# Altium PCB Battery_Charger_BQ24650.PcbDoc (part 1 of 2)
Units mm, origin at the board's own origin, x right, y up, seen from the top; angles counter-clockwise.
Board outline 55 x 60 mm, 2 copper layers (Top Layer, Bottom Layer), stack 1.135 mm thick; 79 components, 33 nets, 199 pads, 65 vias.
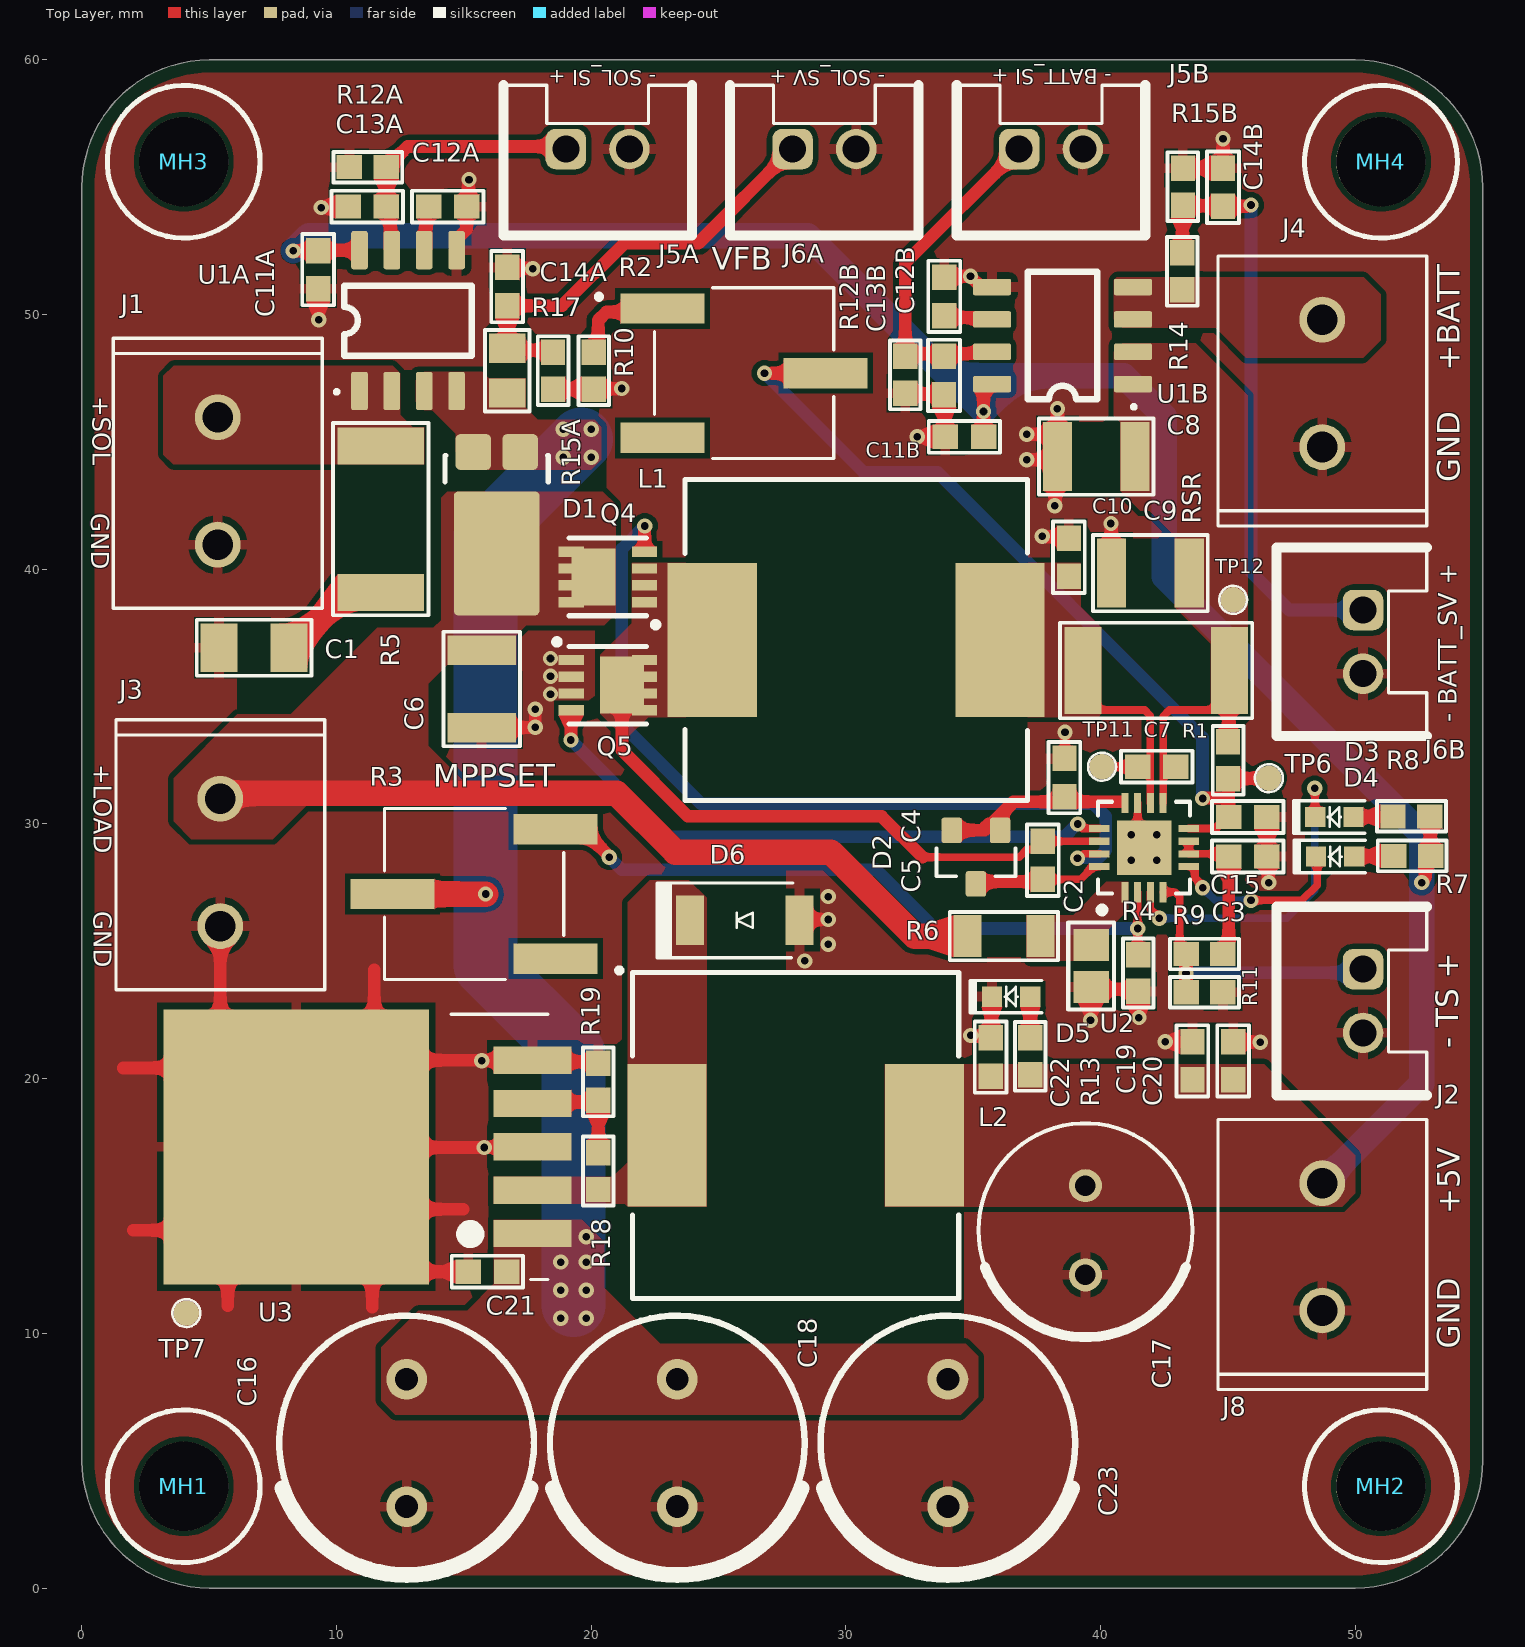
[diagram p0: Top Layer view]
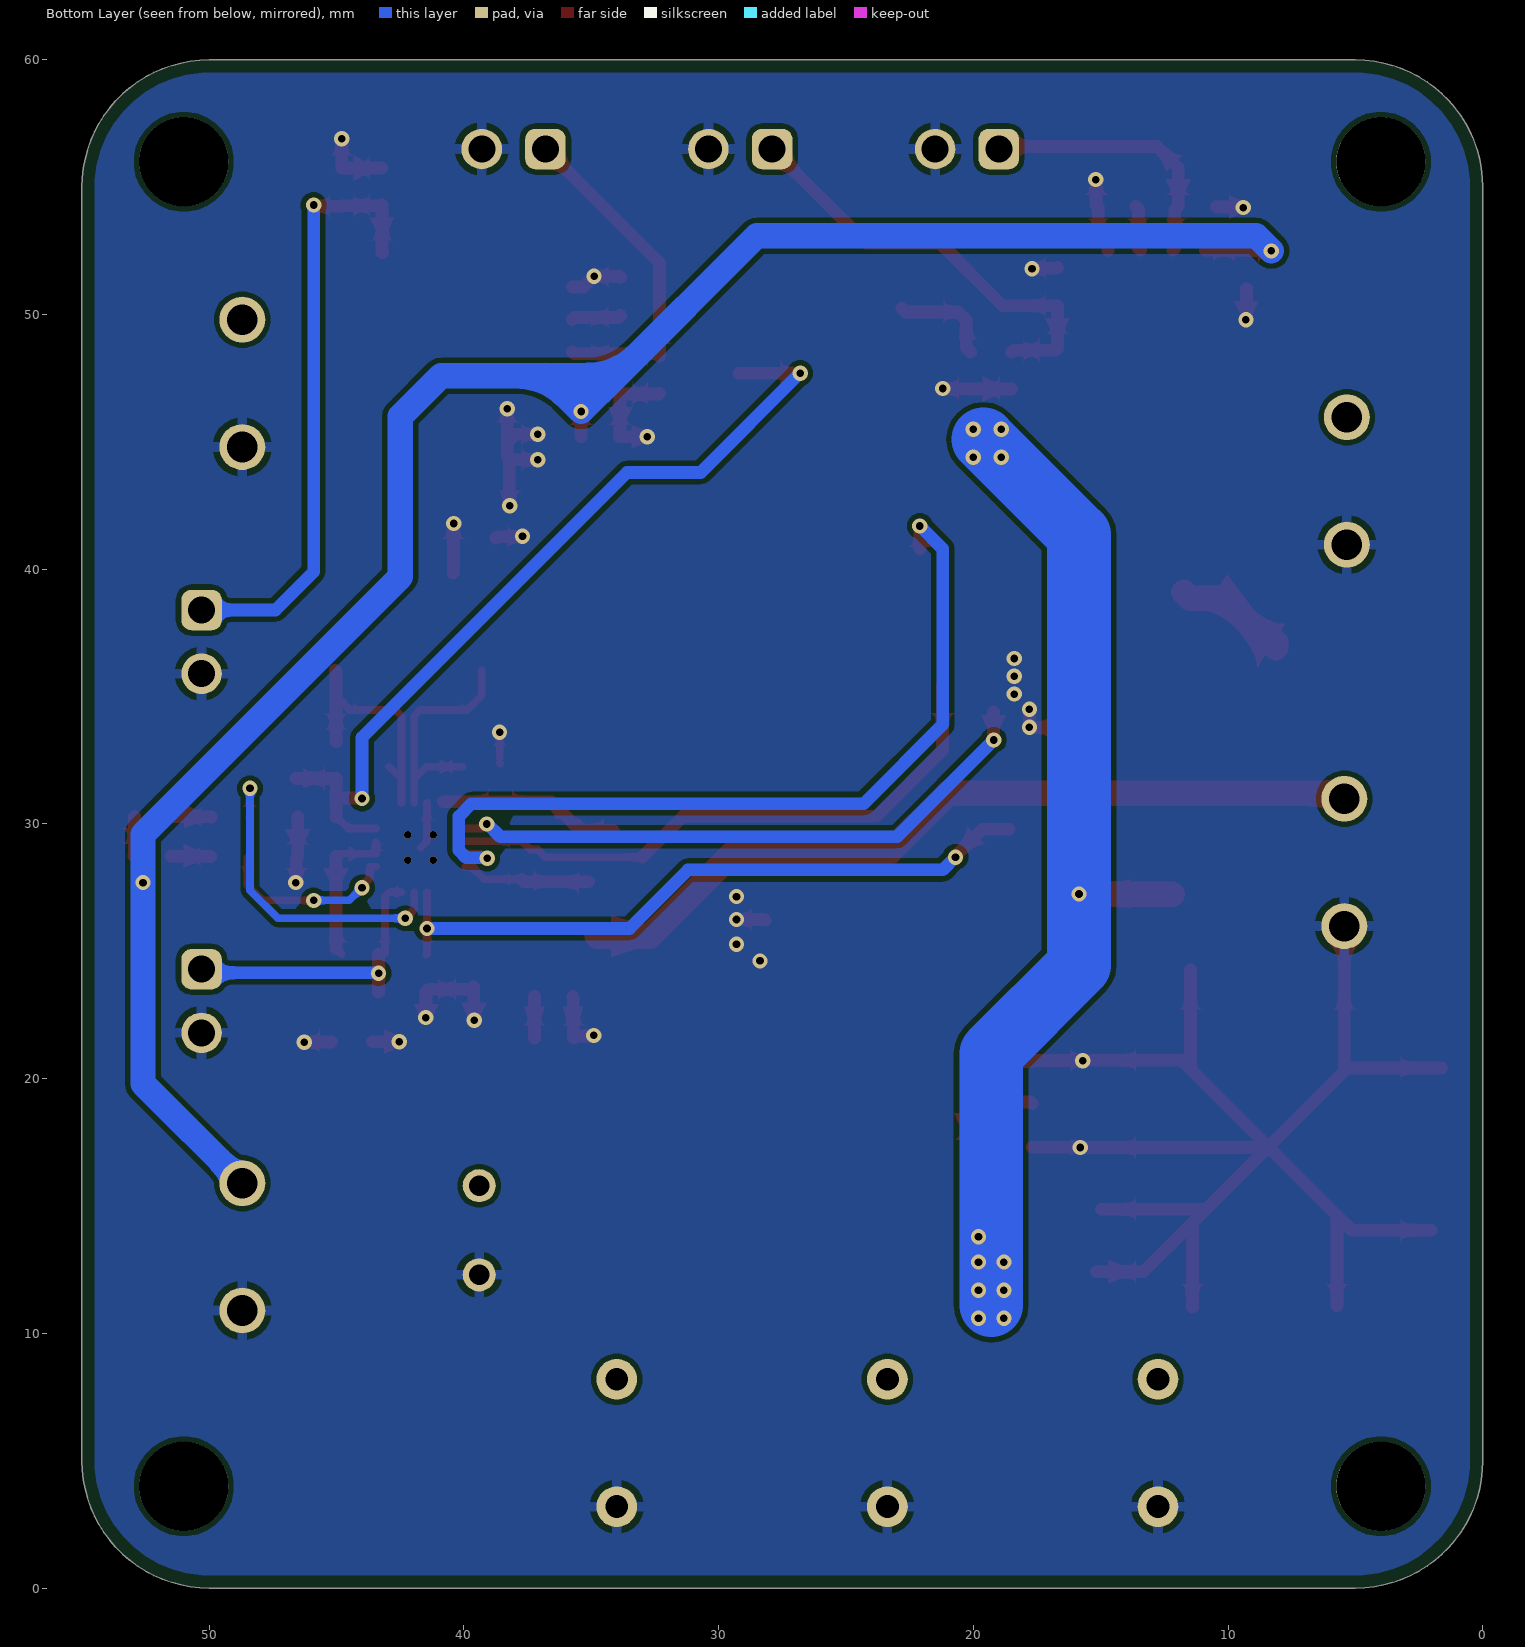
[diagram p1: Bottom Layer view, seen from below]
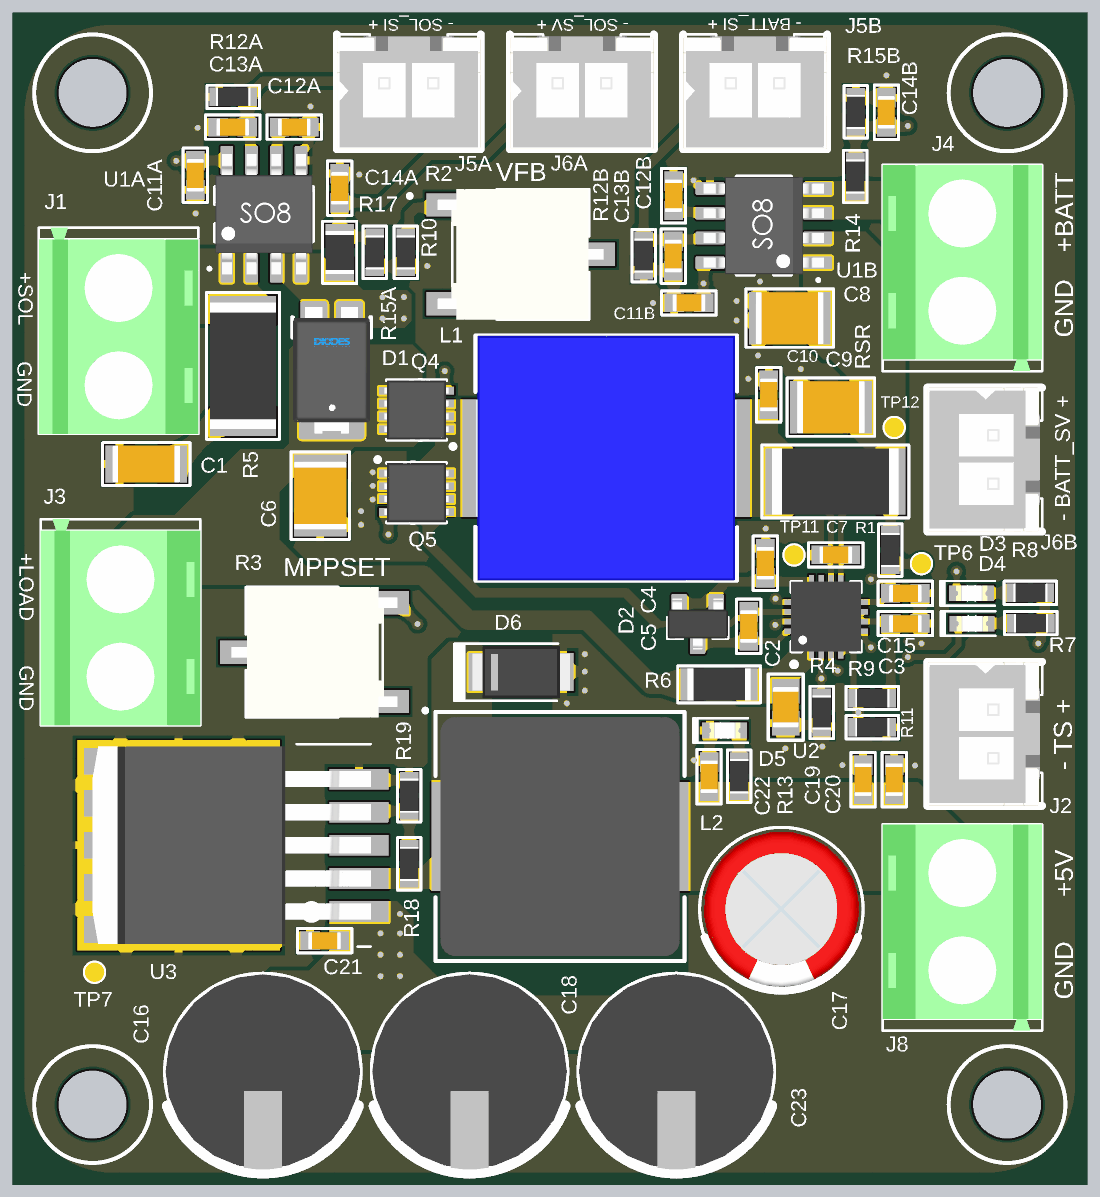
[diagram p2: 3D render of the assembled board from above, using the file's embedded part models]

## Layer stack, top to bottom
Top Solder: solder mask 0.01, Solder Resist, Dk 3.5
Top Layer: signal copper 0.035
Dielectric 1: dielectric 1.065, FR-4, Dk 4.8
Bottom Layer: signal copper 0.035
Bottom Solder: solder mask 0.01, Solder Resist, Dk 3.5

## Board outline
0,5 0,55 cw(c5,55) 5,60 50,60 cw(c50,55) 55,55 55,5 cw(c50,5) 50,0 5,0 cw(c5,5)

## Design rules (kind name [scope] priority, off if disabled: settings)
BoardOutlineClearance [All] p1: gap=0.5 ignorepadtopadclearanceinfootprint=FALSE
Clearance Clearance_DIFF_90_100 [InNetClass('USB_Z90') OR InNetClass('ETH_Z100') vs InNetClass('USB_Z90') OR InNetClass('ETH_Z100')] p1: gap=0.2 ignorepadtopadclearanceinfootprint=TRUE
Clearance Clearance_USB [InNet('D_N') OR InNet('D_P') vs InNet('D_N') OR InNet('D_P')] p2: gap=0.2 ignorepadtopadclearanceinfootprint=TRUE
Clearance Clearance_ALL [All] p3: gap=0.2 ignorepadtopadclearanceinfootprint=TRUE
DiffPairsRouting DiffPair_D90 [InDifferentialPairClass('USB_D90')] p1: maxlimit=0.305 minlimit=0.305 mostfreqgap=0.305 toplayer_minwidth=0.38 toplayer_maxwidth=0.38 toplayer_prefwidth=0.38 bottomlayer_minwidth=0.38 bottomlayer_maxwidth=0.38 bottomlayer_prefwidth=0.38 impedanceprofiledriven=TRUE impedanceprofileid={359ADB75-7CFB-4B50-BE62-D8C1BD735708} impedanceprofilevalue=90.000000 maxuncoupledlength=12.7
DiffPairsRouting DiffPair_D100 [InDifferentialPairClass('ETHERNET_D100')] p2: maxlimit=0.317 minlimit=0.317 mostfreqgap=0.317 toplayer_minwidth=0.31 toplayer_maxwidth=0.31 toplayer_prefwidth=0.31 bottomlayer_minwidth=0.31 bottomlayer_maxwidth=0.31 bottomlayer_prefwidth=0.31 impedanceprofiledriven=TRUE impedanceprofileid={7F6E921B-FC01-47E9-AA2A-496961F6C834} impedanceprofilevalue=100.000000 maxuncoupledlength=12.7
PlaneConnect [All] p1: pad.planeconnectstyle=Relief pad.reliefexpansion=0.508 pad.reliefentries=4 pad.reliefconductorwidth=0.254 pad.reliefairgap=0.254 via.planeconnectstyle=Direct via.reliefexpansion=0.508 via.reliefentries=4 via.reliefconductorwidth=0.254 via.reliefairgap=0.254
PolygonConnect Polygon_SMD [InNet('Vin') OR InNet('Vcc') OR InNet('NetC6_2') OR InNet('ph') OR InNet('NetJ4_2') OR InNet('SRN') OR InNet('SRP') OR InNet('NetD6_2') OR InNet('5V') OR InNet('NetC2_1') vs InNet('Vin') OR InNet('Vcc') OR InNet('NetC6_2') OR InNet('ph') OR InNet('NetJ4_2') OR InNet('SRN') OR InNet('SRP') OR InNet('NetD6_2') OR InNet('5V') OR InNet('NetC2_1')] p1: connectstyle=Direct reliefconductorwidth=0.254 reliefentries=4 polygonreliefangle="90 Angle" airgapwidth=0.254
PolygonConnect [All] p2: thpad.connectstyle=Relief thpad.reliefconductorwidth=0.4 thpad.reliefentries=4 thpad.polygonreliefangle="90 Angle" thpad.airgapwidth=0.254 smdpad.connectstyle=Relief smdpad.reliefconductorwidth=0.4 smdpad.reliefentries=4 smdpad.polygonreliefangle="90 Angle" smdpad.airgapwidth=0.254 via.connectstyle=Direct via.reliefconductorwidth=0.254 via.reliefentries=4 via.polygonreliefangle="90 Angle" via.airgapwidth=0.254
RoutingVias [All] p1: holewidth=0.3 width=0.6 viastyle="Through Hole" minholewidth=0.3 minwidth=0.6 maxholewidth=0.4 maxwidth=0.8
SilkToSilkClearance [All] p1: silktosilkclearance=0.2
SolderMaskExpansion [All] p1: expansion=0.102 istentingtop=FALSE
SupplyNets "Schematic Supply Nets_1" [InNet('VCC')] p1: voltage=0.000
SupplyNets "Schematic Supply Nets_24" [InNet('Vref')] p2: voltage=0.000
SupplyNets "Schematic Supply Nets_23" [InNet('VIN')] p3: voltage=0.000
SupplyNets "Schematic Supply Nets_22" [InNet('5V')] p4: voltage=0.000
SupplyNets "Schematic Supply Nets" [InNet('GND')] p5: voltage=0.000
Width Width_DIFF_90_100 [InNetClass('USB_Z90') OR InNetClass('ETH_Z100')] p1: maxlimit=10 minlimit=0.2 preferedwidth=0.3
Width Width_PADS [InNet('D2_P') OR InNet('D2_N') OR InNet('XTALIN') OR InNet('XTALOUT') OR InNet('PLLFILT') OR InNet('RBIAS') OR InNet('PORT1_P') OR InNet('PORT1_N') OR InNet('PORT2_P') OR InNet('PORT2_N') OR InNet('+3V3_UART') OR InNet('NetC17_1') OR InNet('PRTRWR1') OR InNet('NetD12_2') OR InNet('VBUS_DET_USB') OR InNet('R\E\S\E\T\_HUB') OR InNet('CFG_SEL0') OR InNet('CFG_SEL1') OR InNet('NON_REM1') OR InNet('NON_REM0') OR InNet('O\C\S\1\') OR InNet('O\C\S\2\') OR InNet('PRTRWR2') OR InNet('CRFILT')] p2: maxlimit=10 minlimit=0.254 preferedwidth=0.3
Width [All] p3: maxlimit=10 minlimit=0.3 preferedwidth=0.3
27 further rules are at their usual default settings.

## Classes and differential pairs
channel class Sensor: A B
component class Top_Sheet: C1 C2 C3 C4 C5 C6 C7 C8 C9 C10 C15 C16 C17 C18 C19 C20 C21 C22 C23 D1 D2 D3 D4 D5 D6 J1 J2 J3 J4 L1 L2 MH1 MH2 MH3 MH4 Q4 Q5 R1 R2 R3 R4 R5 R6 R7 R8 R9 R10 R11 R13 R14 R16 R17 R18 R19 RSR TP6 TP7 TP11 TP12 U2 U3
component class B: C11B C12B C13B C14B J5B J6B R12B R15B U1B
component class A: C11A C12A C13A C14A J5A J6A R12A R15A U1A

## Components (designator, comment, footprint, x,y, rotation, side; value= is the part's Value field where it differs from the comment)
C1 "GMK316B7225KLHT" CAP-1206-IPC 6.76,36.918 r180 top value=2.2uF
C2 "CL21B105KBFNNNE" CAP-0805-H1.35-IPC 39.625,24.425 r270 top value=1uF
C3 "CL10B105KO8NNNC" CAP-0603-IPC 45.775,28.725 r180 top value=1uF
C4 "CL10B105KO8NNNC" CAP-0603-IPC 38.575,31.825 r270 top value=1uF
C5 "CL10B104KB8NNWC" CAP-0603-IPC 37.725,28.575 r90 top
C6 "CL32B106KBJNNNE" CAP-1210-IPC 15.7,35.3 r90 top value=10uF
C7 "CL10B104KB8NNWC" CAP-0603-IPC 42.2,32.25 r180 top
C8 "CL32B106KBJNNNE" CAP-1210-IPC 39.825,44.425 r0 top value=10uF
C9 "CL32B106KBJNNNE" CAP-1210-IPC 41.95,39.85 r0 top value=10uF
C10 "CL10B104KB8NNWC" CAP-0603-IPC 38.75,40.475 r270 top
C11A "CL10B104KB8NNWC" CAP-0603-IPC 9.28,51.764 r270 top (schematic designator C11)
C11B "CL10B104KB8NNWC" CAP-0603-IPC 34.65,45.2 r180 top (schematic designator C11)
C12A "CL10B104KB8NNWC" CAP-0603-IPC 14.365,54.239 r180 top (schematic designator C12)
C12B "CL10B104KB8NNWC" CAP-0603-IPC 33.857,50.71 r270 top (schematic designator C12)
C13A "CL10B104KB8NNWC" CAP-0603-IPC 11.205,54.239 r0 top (schematic designator C13)
C13B "CL10B104KB8NNWC" CAP-0603-IPC 33.848,47.61 r90 top (schematic designator C13)
C14A "CL10B104KB8NNWC" CAP-0603-IPC 16.7,51.1 r270 top (schematic designator C14)
C14B "CL10B104KB8NNWC" CAP-0603-IPC 44.8,55 r270 top (schematic designator C14)
C15 "06035C220JAT2A" CAP-0603-IPC 45.775,30.275 r0 top value=22pF
C16 "UVZ1H221MPD" "CAP RADIAL CAN TH D10mm, H12.5mm, LS5mm" 12.75,5.7 r270 top value=220uF
C17 "860020474014" "CAP RADIAL CAN TH D8mm,H13mm,LS3.5mm_860020474014" 39.4,14.05 r270 top value=470uF
C18 "UVZ1H221MPD" "CAP RADIAL CAN TH D10mm, H12.5mm, LS5mm" 23.375,5.7 r270 top value=220uF
C19 "CL10B105KO8NNNC" CAP-0603-IPC 43.6,20.7 r270 top value=1uF
C20 "CL10B104KB8NNWC" CAP-0603-IPC 45.2,20.7 r270 top
C21 "CL10B104KB8NNWC" CAP-0603-IPC 15.925,12.425 r0 top
C22 "CL10B104KB8NNWC" CAP-0603-IPC 35.682,20.85 r270 top
C23 "UVZ1H221MPD" "CAP RADIAL CAN TH D10mm, H12.5mm, LS5mm" 34,5.7 r270 top value=220uF
D1 "SDT10A45P5-13D" Diode_PowerDI5 16.285,41.743 r270 top
D2 "BAT54C,215" "SOT-23-3, TO-236-3, SC-59-IPC" 35.1,28.7 r180 top value=30V
D3 "LTST-C190KRKT" LED-0603(1608) 49.175,30.275 r180 top
D4 "LTST-C190KRKT" LED-0603(1608) 49.2,28.723 r180 top
D5 "LTST-C190GKT" LED-0603(1608) 36.482,23.225 r180 top
D6 "PMEG3050EP,115" SOD-128/CFP5-IPC 26.025,26.225 r180 top value=30V
J1 "282836-2" "HDR/Conn 2 Pos 5mm_282836-2" 5.335,43.468 r270 top
J2 "B2B-XH-A" "HDR 2 POS 2.5mm ST M TH_B2B-XH-A" 50.3,24.3 r270 top
J3 "282836-2" "HDR/Conn 2 Pos 5mm_282836-2" 5.435,28.493 r270 top
J4 "282836-2" "HDR/Conn 2 Pos 5mm_282836-2" 48.7,47.3 r90 top
J5A "B2B-XH-A" "HDR 2 POS 2.5mm ST M TH_B2B-XH-A" 19,56.5 r0 top (schematic designator J5)
J5B "B2B-XH-A" "HDR 2 POS 2.5mm ST M TH_B2B-XH-A" 36.8,56.5 r0 top (schematic designator J5)
J6A "B2B-XH-A" "HDR 2 POS 2.5mm ST M TH_B2B-XH-A" 27.9,56.5 r0 top (schematic designator J6)
J6B "B2B-XH-A" "HDR 2 POS 2.5mm ST M TH_B2B-XH-A" 50.3,38.4 r270 top (schematic designator J6)
J8 "282836-2" "HDR/Conn 2 Pos 5mm_282836-2" 48.7,13.4 r90 top
L1 "125CDMCCDS-100MC" "Ind 13.45mm x 12.6mm_125CDMCCDS-100MC" 30.4,37.225 r0 top value=10uH
L2 "B82477G4333M000" "IND 12.8mmx12.8mm_B82477G4333M000" 28.025,17.775 r180 top value=33uH
MH1 "Mounting Hole" "Mounting Hole D3.5mm" 4,4 r0 top
MH2 "Mounting Hole" "Mounting Hole D3.5mm" 51,4 r0 top
MH3 "Mounting Hole" "Mounting Hole D3.5mm" 4,56 r0 top
MH4 "Mounting Hole" "Mounting Hole D3.5mm" 51,56 r0 top
Q4 "SIS412DN-T1-GE3" "Trans POWERPAK1212-8_SIS412DN-T1-GE3" 20.65,39.7 r180 top
Q5 "SIS412DN-T1-GE3" "Trans POWERPAK1212-8_SIS412DN-T1-GE3" 20.65,35.45 r0 top
R1 "RMCF0603FT510K" RES-0603-IPC 45,32.5 r270 top value=510kΩ
R2 "3361P-1-105GLF" "POT SMD_3361P-1-504GLF" 26,47.7 r0 top value=1MΩ
R3 "3361P-1-504GLF" "POT SMD_3361P-1-504GLF" 15.4,27.25 r180 top value=500kΩ
R4 "RK73H1JTTD3602F" RES-0603-IPC 41.475,24.15 r90 top value=36kΩ
R5 "RMCF2512JT2R00" RES-2512-IPC 11.735,41.968 r90 top
R6 "CSRT1206FT10R0" RES-1206-IPC 36.2,25.6 r180 top value=10Ω
R7 "RK73H1JTTD5600F" RES-0603-IPC 52.225,28.748 r180 top value=560Ω
R8 "RK73H1JTTD5600F" RES-0603-IPC 52.2,30.3 r180 top value=560Ω
R9 "RMCF0603FT9K31" RES-0603-IPC 44.075,24.895 r180 top value=9.31kΩ
R10 "RMCF0603FT49K9" RES-0603-IPC 20.1,47.8 r270 top value=49.9kΩ
R11 "RMCF0603FT430K" RES-0603-IPC 44.075,23.395 r0 top value=430kΩ
R12A "RK73H1JTTD1002F" RES-0603-IPC 11.23,55.789 r0 top value=10kΩ (schematic designator R12)
R12B "RK73H1JTTD1002F" RES-0603-IPC 32.323,47.635 r90 top value=10kΩ (schematic designator R12)
R13 "RK73H1JTTD5600F" RES-0603-IPC 37.232,20.875 r90 top value=560Ω
R14 "RK73H1JTTD1002F" RES-0603-IPC 43.2,51.7 r90 top value=10kΩ
R15A "RC0603DR-072KL" RES-0603-IPC 18.5,47.8 r90 top value=2kΩ (schematic designator R15)
R15B "RC0603DR-072KL" RES-0603-IPC 43.225,55.025 r270 top value=2kΩ (schematic designator R15)
R17 "RK73H2ATTD2492F" RES-0805-IPC 16.7,47.8 r90 top value=24.9kΩ
R18 "RT0603DRE073KL" RES-0603-IPC 20.275,16.375 r270 top value=3kΩ
R19 "RN73R1JTTD1001B25" RES-0603-IPC 20.275,19.875 r90 top value=1kΩ
RSR "CRA2512-FZ-R010ELF" RES-2512-IPC 42.175,36.025 r0 top value=0.01Ω
TP6 "TP" "TP SMD 1mm Dia" 46.6,31.8 r270 top
TP7 "TP" "TP SMD 1mm Dia" 4.1,10.8 r0 top
TP11 "TP" "TP SMD 1mm Dia" 40.05,32.25 r90 top
TP12 "TP" "TP SMD 1mm Dia" 45.2,38.8 r90 top
U1A "ACS723LLCTR-05AB-T" "SOIC-8, SO-8" 12.805,49.764 r90 top (schematic designator U1)
U1B "ACS723LLCTR-05AB-T" "SOIC-8, SO-8" 38.5,49.175 r180 top (schematic designator U1)
U2 "BQ24650RVAR" VQFN-16_EP_w_via 41.7,29.075 r90 top
U3 "LM2596DSADJG" TO-263-5/DDPAK/D²Pak_LM2679SX-5.0/NOPB 12.9,17.325 r90 top

## Footprints (in the part's own frame and the unit in brackets; to place one, negate y for a bottom-side part, rotate by r counter-clockwise, add the part's x,y. Pads: shape width x height; smd on the part's side, far side on the other; paste and mask are expansions set on the pad)
"CAP RADIAL CAN TH D8mm,H13mm,LS3.5mm_860020474014" [mm] "Aluminum Electrolytic Capacitors, 8x13mm"
  round 1.3 hole 0.8: 1(-1.75,0) 2(1.75,0)
  silkscreen extent -4.2,-4.2 4.2,4.2, body extent -3.99,-3.99 3.99,4, height 11.81
"CAP RADIAL CAN TH D10mm, H12.5mm, LS5mm" [mm]
  round 1.6 hole 0.9: 1(-2.5,0) 2(2.5,0)
  silkscreen extent -5,-5 5.2,5, body extent -5,-5 5.03,5, height 12.31
CAP-0603-IPC [mm] "Chip Capacitor, 2-Leads, Body 1.60x0.80mm, IPC Medium Density"
  rect 1x0.95 smd: 1(-0.75,0) 2(0.75,0)
  silkscreen extent -1.4,-0.63 1.4,0.63, body extent -0.85,-0.45 0.85,0.45, height 0.9
CAP-0805-H1.35-IPC [mm] "Chip Capacitor, 2-Leads, Body 2.00x1.25mm, IPC Medium Density"
  rect 1.25x1.4 smd: 1(-0.825,0) 2(0.825,0)
  silkscreen extent -1.7,-0.9 1.7,0.9, body extent -1.05,-0.67 1.05,0.67, height 1.35
CAP-1206-IPC [mm] "Chip Capacitor, 2-Leads, Body 3.20x1.60mm, IPC Medium Density"
  rect 1.45x1.9 smd: 1(-1.375,0) 2(1.375,0)
  silkscreen extent -2.25,-1.1 2.25,1.1, body extent -1.75,-0.95 1.75,0.95, height 1.9
CAP-1210-IPC [mm] "Chip Capacitor, 2-Leads, Body 3.20x2.50mm, IPC Medium Density"
  rect 1.15x2.7 smd: 1(-1.525,0) 2(1.525,0)
  silkscreen extent -2.25,-1.5 2.25,1.5, body extent -1.75,-1.35 1.75,1.35, height 2.7
Diode_PowerDI5 [mm] "PDS1040-13 / SDT10A45P5-7"
  rrect25% 1.4x1.39 smd: 1(-2.862,0.923) 2(-2.862,-0.917)
  rrect10% 4.86x3.36 smd: 3(1.12,0)
  silkscreen extent -2.73,-2.02 -1.69,2.02, body extent -3.66,-2.12 3.65,2.12, height 0.25
"HDR 2 POS 2.5mm ST M TH_B2B-XH-A" [mm]
  rrect50% 1.59x1.59 hole 1.06: 1(0,0)
  round 1.59 hole 1.06: 2(2.5,0)
  silkscreen extent -2.45,-3.4 4.95,2.5, body extent -2.55,-3.5 5.05,2.45, height 9.43
"HDR/Conn 2 Pos 5mm_282836-2" [mm] "282836-2"
  round 1.8 hole 1.2: 1(-2.5,0) 2(2.5,0)
  silkscreen extent -5.6,-4.1 5,4.1, body extent -5.6,-4.1 5,4.1, height 10
"IND 12.8mmx12.8mm_B82477G4333M000" [mm]
  rect 3.1x5.6 smd: 1(-5.05,0) 2(5.05,0)
  silkscreen extent -6.4,-6.4 6.4,6.4, body extent -6.15,-6.15 6.15,6.15, height 6
"Ind 13.45mm x 12.6mm_125CDMCCDS-100MC" [mm] "125CDMCCDS-100MC"
  rect 3.5x6.05 smd: 1(-5.65,0) 2(5.65,0)
  silkscreen extent -6.73,-6.3 6.73,6.3, body extent -6.73,-6.3 6.73,6.3, height 5
LED-0603(1608) [mm]
  rect 0.8x0.8 smd: 1(-0.75,0) 2(0.75,0)
  silkscreen extent -1.2,-0.64 1.6,0.64, body extent -0.81,-0.4 0.79,0.4, height 0.8
"Mounting Hole D3.5mm" [mm]
  round 3.5 hole 3.5 unplated: 1(0,0)
  silkscreen extent -3,-3 3,3
"POT SMD_3361P-1-504GLF" [mm] "3361P-1-504GLF"
  rect 3.3x1.19 smd: 1(-3.2,2.54) 2(3.2,0) 3(-3.2,-2.54)
  silkscreen extent -5.8,-3.35 3.52,3.35, body extent -4.27,-3.35 4.27,3.35, height 5.84
RES-0603-IPC [mm] "Chip Resistor, 2-Leads, Body 1.60x0.80mm, IPC Medium Density"
  rect 1x0.95 smd: 1(-0.725,0) 2(0.725,0)
  silkscreen extent -1.35,-0.6 1.35,0.6, body extent -0.87,-0.48 0.87,0.48, height 0.55
RES-0805-IPC [mm]
  rect 1.15x1.45 smd: 1(-0.875,0) 2(0.875,0)
  silkscreen extent -1.6,-0.87 1.6,0.87, body extent -1.1,-0.72 1.1,0.72, height 0.6
RES-1206-IPC [mm] "Chip Resistor, 2-Leads, Body 3.13x1.55mm, IPC Medium Density"
  rect 1.1x1.65 smd: 1(-1.43,0) 2(1.43,0)
  silkscreen extent -2.12,-0.95 2.12,0.95, body extent -1.63,-0.82 1.63,0.82, height 0.7
RES-2512-IPC [mm] "Chip Resistor, 2-Leads, Body 6.30x3.20mm, IPC Medium Density"
  rect 1.45x3.4 smd: 1(-2.875,0) 2(2.875,0)
  silkscreen extent -3.78,-1.88 3.77,1.87, body extent -3.25,-1.7 3.25,1.7, height 0.7
SOD-128/CFP5-IPC [mm] "SODFL, 2-Leads, Body 2.50x4.70mm, IPC Medium Density"
  rect 1.1x1.95 smd: 1(-2.15,0) 2(2.15,0)
  silkscreen extent -1.9,-1.46 3.44,1.47, body extent -2.5,-1.35 2.5,1.35, height 1.1
"SOIC-8, SO-8" [mm] "8-SOIC (0.154\", 3.90mm Width) / SOIC, 8-Leads, Body 4.9x3.9mm, Pitch 1.27mm, IPC Medium Density"
  rrect25% 1.5x0.65 smd: 1(-2.765,1.905) 2(-2.765,0.635) 3(-2.765,-0.635) 4(-2.765,-1.905) 5(2.765,-1.905) 6(2.765,-0.635) 7(2.765,0.635) 8(2.765,1.905)
  silkscreen extent -2.85,-2.5 1.37,2.85, body extent -3.1,-2.5 3.1,2.5, height 1.75
"SOT-23-3, TO-236-3, SC-59-IPC" [mm] "SOT23, 3-Leads, Body 2.90x2.40mm, Pitch 0.95mm, IPC Medium Density"
  rrect25% 0.8x1 smd: 1(-0.95,-1.05) 2(0.95,-1.05) 3(0,1.05)
  silkscreen extent -1.55,-0.35 1.55,0.75, body extent -1.55,-1.3 1.55,1.3, height 1.15
TO-263-5/DDPAK/D²Pak_LM2679SX-5.0/NOPB [mm]
  rect 1.07x3.05 smd: 1(-3.4,-4.792) 2(-1.7,-4.792) 3(0,-4.792) 4(1.7,-4.792) 5(3.4,-4.792)
  rect 10.8x10.41 smd paste-6: 6(0,4.483)
  silkscreen extent -5.2,-5.39 5.2,-1.59, body extent -5.08,-5.4 5.08,8.9, height 4.57
"TP SMD 1mm Dia" [mm]
  round 1 smd paste-0.7: 1(0,0)
  silkscreen extent -0.55,-0.55 0.55,0.55
"Trans POWERPAK1212-8_SIS412DN-T1-GE3" [mm] "PowerPAK® 1212-8"
  rect 0.99x0.405 smd: 1(-1.435,0.99) 2(-1.435,0.33) 3(-1.435,-0.33) 4(-1.435,-0.99) 5(1.435,-0.99) 6(1.435,-0.33) 7(1.435,0.33) 8(1.435,0.99)
  rect 1.725x2.235 smd: 9(0.557,0)
  silkscreen extent -1.98,-1.53 1.53,1.97, body extent -1.65,-1.65 1.65,1.65, height 1.12
VQFN-16_EP_w_via [mm] "VQFN-16 (3.5x3.5) / VQFN, 16-Leads, Body 3.50x3.50mm, Pitch 0.50mm, Thermal Pad 2.14x2.14mm, IPC High Density"
  rect 0.8x0.28 smd: 1(-1.75,0.75) 2(-1.75,0.25) 3(-1.75,-0.25) 4(-1.75,-0.75) 9(1.75,-0.75) 10(1.75,-0.25) 11(1.75,0.25) 12(1.75,0.75)
  rect 0.28x0.8 smd: 5(-0.75,-1.75) 6(-0.25,-1.75) 7(0.25,-1.75) 8(0.75,-1.75) 13(0.75,1.75) 14(0.25,1.75) 15(-0.25,1.75) 16(-0.75,1.75)
  rect 2.14x2.14 smd: 17(0,0)
  silkscreen extent -2.57,-1.8 1.8,1.8, body extent -1.8,-1.8 1.8,1.8, height 1

## Part data
C1: library part "Cap 2.2uF 35V X7R 1210(3225) 10% MLCC_GMK316B7225KLHT", "Cap Ceramic 2.2uF 35V X7R 10% Pad SMD 1206 125C Automotive T/R", Manufacturer="Taiyo Yuden", Supplier Part Number=587-3370-1-ND, Voltage Rating=35V, Category="Ceramic Capacitors", ComponentLink1Description=DataSheet, ComponentLink1URL=https://mm.digikey.com/Volume0/opasdata/d220001/medias/docus/1904/GMK316B7225KLHT_SS.pdf, ComponentLink2Description=Digikey, ComponentLink2URL=https://www.digikey.com/en/products/detail/taiyo-yuden/GMK316B7225KLHT/4157593, ComponentLink3Description=Mouser, ComponentLink3URL=https://eu.mouser.com/ProductDetail/TAIYO-YUDEN/GMK316B7225KLHT?qs=CNQs48zzdnqgmIR1MOeXjQ%3D%3D, Manufacturer Part Number=GMK316B7225KLHT, Pricing="1=0.26, 10=0.156, 100=0.1031, 1000=0.07388 (USD)", RoHS=Yes, Stock=4692, Supplier=Digikey
C2: library part "Cap 1uF 50V X7R 0805(2012) 10% MLCC_CL21B105KBFNNNE", "Multilayer Ceramic Capacitor, 1 uF, 50 V, ± 10%, X7R, 0805 [2012 Metric]", Case Code (Imperial)=0805, Case Code (Metric)=2012, Dielectric=X7R, Manufacturer=Samsung, Max Operating Temperature=125°C, Min Operating Temperature=-55°C, Package Quantity=1, Supplier Part Number 1=1276-1029-1-ND, Tolerance=10%, Voltage=50V, Case/Package=0805, Category="Ceramic Capacitors", ComponentLink1Description=DataSheet, ComponentLink1URL=https://mm.digikey.com/Volume0/opasdata/d220001/medias/docus/609/CL21B105KBFNNNE_Spec.pdf, ComponentLink2Description=Digikey, ComponentLink2URL=https://www.digikey.com/en/products/detail/samsung-electro-mechanics/CL21B105KBFNNNE/3886687, ComponentLink3Description=Mouser, ComponentLink3URL=https://eu.mouser.com/ProductDetail/Samsung-Electro-Mechanics/CL21B105KBFNNNE?qs=yOVawPpwOwmddQEBPU6Y9A%3D%3D, Construction=Flat, Depth=1.25mm, Height=1.25mm, Length=2mm, Manufacturer Part Number=CL21B105KBFNNNE, Material=Ceramic, Mounting Technology="Surface Mount", Packaging="Tape and Reel", Pricing 1="1=0.11, 10=0.075, 50=0.045, 100=0.0354, 500=0.02616, 1000=0.02165 (USD)", Pricing 2="1=0.11, 10=0.045, 50=0.045, 100=0.027, 1000=0.026, 10000=0.015 (USD)", Radiation Hardening=No, RoHS=Yes, RoHS Compliant=Yes, Series=CL, Stock 1=1386161, Stock 2=143001, Supplier 1=Digi-Key, Supplier 2=Mouser, Supplier Part Number 2=187-CL21B105KBFNNNE, Thickness=0.053inch, Voltage Rating=50V, Voltage Rating (DC)=50V, Width=0.049inch
C3 C4 C19: library part "Cap 1uF 16V X7R 0603(1608) 10% MLCC_CL10B105KO8NNNC", "1 µF ±10% 16V Ceramic Capacitor X7R 0603 (1608 Metric)", Capacitor Type=Ceramic, Case/Package=0603, Manufacturer=Samsung, Max Operating Temperature=125°C, Min Operating Temperature=-55°C, Package Shape=Rectangular, Rated DC Voltage (URdc)=16V, Supplier Part Number=1276-1019-1-ND, Temperature Characteristics Code=X7R, Tolerance  (fill in as +-)=10%, Category="Ceramic Capacitors", ComponentLink1Description=DataSheet, ComponentLink1URL=https://weblib.samsungsem.com/mlcc/mlcc-ec-data-sheet.do?partNumber=CL10B105KO8NNN, ComponentLink2Description=Digikey, ComponentLink2URL=https://www.digikey.com/en/products/detail/samsung-electro-mechanics/CL10B105KO8NNNC/3886677, ComponentLink3Description=Mouser, ComponentLink3URL=https://eu.mouser.com/ProductDetail/Samsung-Electro-Mechanics/CL10B105KO8NNNC?qs=349EhDEZ59o2mlUAs%2FkaKg%3D%3D, Dielectric Material=Ceramic, JESD-609 Code=e3, Manufacturer Part Number=CL10B105KO8NNNC, Mounting Technology="Surface Mount", Multilayer=Yes, Packaging="Tape and Reel", Pins=2, Pricing="1=0.08, 10=0.018, 50=0.0148, 100=0.0112, 500=0.01, 1000=0.0088 (USD)", Reach SVHC Compliant=Yes, RoHS=Yes, RoHS Compliant=Yes, Stock=3938478, Supplier=Digikey, Terminal Finish=Nickel, Termination=Wraparound, Tolerance (fill in as +-)=10%
C5 C7 C10 C11A C11B C12A C12B C13A C13B C14A C14B C20 C21 C22: library part "Cap 100nF 50V X7R 0603(1608) 10% MLCC_CL10B104KB8NNWC", "CAP CER 0.1UF 50V X7R 0603", Capacitance=100nF, Case Code (Imperial)=0603, Case Code (Metric)=1608, Dielectric=X7R, Manufacturer=Samsung, Max Operating Temperature=125°C, Min Operating Temperature=-55°C, Package Quantity=1, Supplier Part Number 1=1276-1935-1-ND, Tolerance=10%, Voltage Rating=50V, Case/Package=0603, Category="Ceramic Capacitors", ComponentLink2Description=Digikey, ComponentLink2URL=https://www.digikey.com/en/products/detail/samsung-electro-mechanics/CL10B104KB8NNWC/3887593, ComponentLink3Description=DataSheet, ComponentLink3URL=https://media.digikey.com/pdf/Data%20Sheets/Samsung%20PDFs/CL10B104KB8NNWC_Spec.pdf, ComponentLink4Description=Mouser, ComponentLink4URL=https://eu.mouser.com/ProductDetail/Samsung-Electro-Mechanics/CL10B104KB8NNWC?qs=EvNa9vf1TdYOAZGBJN%252BGRQ%3D%3D, Construction=Flat, Contact Plating=Tin, Length=0.063inch, Manufacturer Part Number=CL10B104KB8NNWC, Mount="Surface Mount", Packaging="Cut Tape", Pricing 1="1=0.10000, 10=0.01900, 50=0.01020, 100=0.00830, 500=0.00594, 1000=0.00467 (USD)", Pricing 2="1=0.1, 10=0.011, 50=0.011, 100=0.006, 1000=0.005, 10000=0.003 (USD)", RoHS=Yes, RoHS Compliant=Yes, Series=CL, Stock 1=12481520, Stock 2=1032910, Supplier 1=Digi-Key, Supplier 2=Mouser, Supplier Part Number 2=187-CL10B104KB8NNWC, Termination=Wraparound, Thickness=0.035inch, Width=0.031inch
C6 C8 C9: library part "Cap 10uF 50V 1210(3225) 10% MLCC X7R_CL32B106KBJNNNE", "Multilayer Ceramic Capacitor, 10 uF, 50 V, ï¿½ 10%, X7R, 1210 [3225 Metric]", Manufacturer=Samsung, Supplier Part Number 1=1276-3387-1-ND, Voltage Rating=50V, Category="Ceramic Capacitors", ComponentLink1Description=DataSheet, ComponentLink1URL=https://mm.digikey.com/Volume0/opasdata/d220001/medias/docus/41/CL32B106KBJNNNE_Spec.pdf, ComponentLink2Description=Digikey, ComponentLink2URL=https://www.digikey.com/en/products/detail/samsung-electro-mechanics/CL32B106KBJNNNE/3889045?s=N4IgTCBcDaIIxgOwDYC0BmdAORq6oDkAREAXQF8g, ComponentLink3Description=Mouser, ComponentLink3URL=https://eu.mouser.com/ProductDetail/Samsung-Electro-Mechanics/CL32B106KBJNNNE?qs=349EhDEZ59rXK%2FOM74I5cg%3D%3D, Lead Free=5697LeadFree, Manufacturer Part Number=CL32B106KBJNNNE, Pricing 1="1=0.59, 10=0.356, 50=0.2618, 100=0.2323, 500=0.1823 (USD)", Pricing 2="1=0.52, 10=0.281, 50=0.281, 100=0.181, 1000=0.151, 10000=0.124 (USD)", RoHS=Yes, Stock 1=212314, Stock 2=284474, Supplier 1=Digikey, Supplier 2=Mouser, Supplier Part Number 2=187-CL32B106KBJNNNE, Voltage Rating (DC)=50V
C15: library part "Cap 22pF 50V X7R 0603(1608) 5% MLCC_06035C220JAT2A", "0603 22 pF 50 V ±5 % Tolerance X7R Surface Mount Multilayer Ceramic Capacitor", Manufacturer="Kyocera AVX", Supplier Part Number 1=478-6204-1-ND, Voltage=50V, Category="Ceramic Capacitors", ComponentLink1Description=DataSheet, ComponentLink1URL=https://datasheets.kyocera-avx.com/X7RDielectric.pdf, ComponentLink2Description=Digikey, ComponentLink2URL=https://www.digikey.com/en/products/detail/kyocera-avx/06035C220JAT2A/1600097, ComponentLink3Description=Mouser, ComponentLink3URL=https://eu.mouser.com/ProductDetail/KYOCERA-AVX/06035C220JAT2A?qs=EbDiPP9peV8r1LlCcc83tg%3D%3D, Manufacturer Part Number=06035C220JAT2A, Pricing 1="1=0.1, 10=0.062, 50=0.0358, 100=0.0277, 500=0.02084, 1000=0.01637 (USD)", Pricing 2="1=0.1, 10=0.036, 50=0.036, 100=0.022, 1000=0.021, 10000=0.018 (USD)", RoHS=Yes, Stock 1=213034, Stock 2=47793, Supplier 1=Digi-Key, Supplier 2=Mouser, Supplier Part Number 2=581-06035C220JAT2A
C16 C18 C23: library part "Cap 220uF 50V 20% Alum.Electrolytic TH_UVZ1H221MPD", "Capacitor Aluminum Electrolytic, 220uF 50 V, 1000h 10 (Dia) x 12.5mm, VZ Series", Manufacturer=Nichicon, Supplier Part Number=493-1342-ND, Category="Aluminum Electrolytic Capacitors", ComponentLink1Description=DataSheet, ComponentLink1URL=https://www.nichicon.co.jp/english/series_items/catalog_pdf/e-uvz.pdf, ComponentLink2Description=Digikey, ComponentLink2URL=https://www.digikey.com/en/products/detail/nichicon/UVZ1H221MPD/589083, ComponentLink3Description=Mouser, ComponentLink3URL=https://eu.mouser.com/ProductDetail/Nichicon/UVZ1H221MPD?qs=TcI%252BB%2FoBdJvNhhIN8Mps8g%3D%3D, Manufacturer Part Number=UVZ1H221MPD, Pricing="1=0.52, 10=0.328, 50=0.2496, 100=0.2246, 500=0.18054, 2000=0.15395, 4000=0.14352, 6000=0.13813 (USD)", RoHS=Yes, Stock=9223, Supplier=Digikey
C17: library part "Cap 470uF 25V 20% Alum.Electrolytic_860020474014", "470 µF 25 V Aluminum Electrolytic Capacitors Radial, Can 2000 Hrs @ 105°C", Capacitor Type=Aluminium, Manufacturer="Wurth Electronics", Supplier Part Number=732-8831-1-ND, Voltage Rating=25V, Category="Aluminum Electrolytic Capacitors", ComponentLink1Description=DataSheet, ComponentLink1URL=https://www.we-online.com/components/products/datasheet/860020474014.pdf, ComponentLink2Description=Digikey, ComponentLink2URL=https://www.digikey.com/en/products/detail/w%C3%BCrth-elektronik/860020474014/5727068, ComponentLink3Description=Mouser, ComponentLink3URL=https://eu.mouser.com/ProductDetail/Wurth-Elektronik/860020474014?qs=0KOYDY2FL2%252BfCDf5E%252Bq6Tw%3D%3D, Dielectric Material=Aluminium, Manufacturer Part Number=860020474014, Pins=2, Pricing="1=0.32, 50=0.27, 100=0.2358, 250=0.20972 (USD)", Reach SVHC Compliant=Yes, RoHS=Yes, RoHS Compliant=Yes, Stock=471, Supplier=Digikey
D1: library part "Diode Schottky 45V 10A PowerDI5__SDT10A45P5-13", "Tape & Reel (TR) Surface Mount Schottky SINGLE Diode Schottky 470mV @ 10A 10A 45V -55C~150C", Average Rectified Current=10A, Manufacturer=Diodes, Manufacturer Part Number=SDT10A45P5-13, Max Reverse Voltage (DC)=45V, Supplier Part Number=31-SDT10A45P5-13CT-ND, Category=LDO, ComponentLink1Description=DataSheet, ComponentLink1URL=https://www.diodes.com/assets/Datasheets/SDT10A45P5.pdf, ComponentLink2Description=Digikey, ComponentLink2URL=https://www.digikey.com/en/products/detail/diodes-incorporated/SDT10A45P5-13/9769517, ComponentLink3Description=Mouser, ComponentLink3URL=https://eu.mouser.com/ProductDetail/Diodes-Incorporated/SDT10A45P5-13?qs=wUXugUrL1qzOQATtsgO6Zw%3D%3D, Mounting Technology="Surface Mount", Pricing="1=0.48, 10=0.319, 100=0.247, 500=0.18708, 1000=0.15972, 2000=0.15144 (USD)", RoHS=Yes, Series=-, Stock=14618, Supplier=Digikey
D2: library part "Diode Schottky 30V 0.2A SOT-23-3_BAT54C,215", "BAT54 Series 30V 2 uA Surface Mount Schottky Barrier Diode - SOT-23", Case/Package=926Case, Forward Current=200mA, Forward Voltage=800mV, Manufacturer=Nexperia, Max Forward Surge Current (Ifsm)=600mA, Max Operating Temperature=150°C, Max Reverse Current=2uA, Reverse Voltage=30V, Supplier Part Number 1=1727-2902-1-ND, Category="Schottky Diodes", ComponentLink1Description=DataSheet, ComponentLink1URL=https://assets.nexperia.com/documents/data-sheet/BAT54C.pdf, ComponentLink2Description=Digikey, ComponentLink2URL=https://www.digikey.com/en/products/detail/nexperia-usa-inc/BAT54C-215/763216?s=N4IgTCBcDaIIwHYwILRgJwAYwoGwoDkAREAXQF8g, ComponentLink3Description=Mouser, ComponentLink3URL=https://eu.mouser.com/ProductDetail/Nexperia/BAT54C215?qs=me8TqzrmIYV5SKKt13YKQA%3D%3D, Height=1.1mm, Manufacturer Part Number=BAT54C,215, Packaging=13Packaging, Pins=3NUMBER, Pricing 1="1=0.1, 10=0.07, 100=0.0469, 500=0.03554, 1000=0.03165 (USD)", Pricing 2="1=0.1, 10=0.07, 50=0.07, 100=0.036, 1000=0.031, 10000=0.017 (USD)", RoHS=Yes, RoHS Compliant=5897YesNo, Stock 1=1185105, Stock 2=213968, Supplier 1=Digikey, Supplier 2=Mouser, Supplier Part Number 2=771-BAT54C-T/R
D3 D4: library part "Diode LED RED 2.4V 30mA 0603(1608)_LTST-C190KRKT", "LED LTST-C190KRKT; SMD 0603; czerwona 631-639nm; 99mcd /20mA; water clear", Case Code (Imperial)=0603, Case Code (Metric)=1608, Color=Red, Forward Current=30mA, Forward Voltage=2.4V, Lens Color=Colorless, Manufacturer="Vishay Lite-On", Max Operating Temperature=85°C, Min Operating Temperature=-55°C, Package Quantity=3000, Power Dissipation=75mW, Reverse Voltage=5V, Supplier Part Number 1=160-1436-1-ND, Test Current=20mA, Tolerance=20%, Voltage Rating=50V, Case/Package=0603, Category=LEDs, ComponentLink1Description=DataSheet, ComponentLink1URL=https://optoelectronics.liteon.com/upload/download/DS-22-99-0151/LTST-C190KRKT.pdf, ComponentLink2Description=Digikey, ComponentLink2URL=https://www.digikey.com/en/products/detail/liteon/LTST-C190KRKT/386817, ComponentLink3Description=Mouser, ComponentLink3URL=https://eu.mouser.com/ProductDetail/Lite-On/LTST-C190KRKT?qs=kAD5fFa1n5VY3YYNWPC1Fg%3D%3D, Depth=0.8mm, Dominant Wavelength=631nm, Height=0.9mm, Illumination Color=Red, Length=1.6mm, Lens Size=0.8mm, Lens Style=Flat,Diffused,Colorless,Rectangular,Clear, Lens Transparency=Clear, Luminous Intensity=54mcd, Manufacturer Part Number=LTST-C190KRKT, Mounting Technology="Surface Mount", Number of Elements=1, Number of LEDs=1, Packaging="Tape and Reel", Pins=2, Power Rating=75mW, Pricing 1="1=0.24, 10=0.133, 100=0.0617, 500=0.05696, 1000=0.04462, 2000=0.04367 (USD)", Pricing 2="1=0.24, 10=0.13, 50=0.13, 100=0.059, 1000=0.042, 10000=0.031 (USD)", Radiation Hardening=No, Reach SVHC Compliant=4186SVHC, RoHS=Yes, RoHS Compliant=Yes, Series=-, Stock 1=201048, Stock 2=109362, Supplier 1=Digikey, Supplier 2=Mouser, Supplier Part Number 2=859-LTST-C190KRKT, Viewing Angle=130°, Voltage Rating (DC)=50V, Wavelength=639nm, Width=0.8mm
D5: library part "Diode LED GREEN 2.1V 20mA 0603(1608)_LTST-C190GKT", "Green 569nm LED Indication - Discrete 2.1V 0603 (1608 Metric)", Case Code (Imperial)=0603, Case Code (Metric)=1608, Color=Green, Forward Current=30mA, Forward Voltage=2.1V, Lens Color=Colorless, Manufacturer="Vishay Lite-On", Max Operating Temperature=85°C, Min Operating Temperature=-55°C, Package Quantity=1, Power Dissipation=100mW, Reverse Voltage=5V, Supplier Part Number 1=160-1183-1-ND, Test Current=10mA, Voltage=2V, Case/Package=0603, Category=LEDs, ComponentLink1Description=DataSheet, ComponentLink1URL=https://mm.digikey.com/Volume0/opasdata/d220001/medias/docus/858/LTST-C190GKT.pdf, ComponentLink2Description=Digikey, ComponentLink2URL=https://www.digikey.com/en/products/detail/liteon/LTST-C190GKT/269230?s=N4IgTCBcDaIDIBUDKCC0BhAjATgAwHEBpBEAXQF8g, ComponentLink3Description=Mouser, ComponentLink3URL=https://eu.mouser.com/ProductDetail/Lite-On/LTST-C190GKT?qs=drxkyCeiWgbQzclgbojDOg%3D%3D, Depth=0.8mm, Dominant Wavelength=569nm, Height=0.9mm, Illumination Color=Green, Lead Free="Lead Free", Length=1.6mm, Lens Size=0.8mm, Lens Style=Flat,Diffused,Colorless,Rectangular,Clear, Lens Transparency=Clear, Luminous Intensity=6mcd, Manufacturer Part Number=LTST-C190GKT, Mounting Technology="Surface Mount", Number of Elements=1, Number of LEDs=1, Packaging="Tape and Reel", Pins=2, Power Rating=100mW, Pricing 1="1=0.23, 10=0.126, 100=0.0587, 500=0.05414, 1000=0.04241, 2000=0.04151 (USD)", Pricing 2="1=0.24, 10=0.132, 50=0.132, 100=0.062, 1000=0.044, 10000=0.032 (USD)", Radiation Hardening=No, RoHS=Yes, RoHS Compliant=Yes, Series=-, Stock 1=690563, Stock 2=352473, Supplier 1=Digi-Key, Supplier 2=Mouser, Supplier Part Number 2=859-LTST-C190GKT, Viewing Angle=130°, Wavelength=565nm, Width=0.8mm
D6: library part "Diode Schottky 30V 5A SMD SOD-128_PMEG3050EP,115", "Rectifier Diode Schottky 30V 5A Automotive 2-Pin SOD-128 T/R / DIODE SCHOTTKY 30V 5A SOD128", Average Rectified Current=5A, Case/Package=2175Case, Forward Voltage=360mV, Manufacturer=Nexperia, Max Forward Surge Current (Ifsm)=70A, Max Operating Temperature=150°C, Max Power Dissipation=625mW, Max Repetitive Reverse Voltage (Vrrm)=30V, Max Reverse Current=2.6mA, Min Operating Temperature=-55°C, Supplier Part Number 1=1727-5317-1-ND, Category="Schottky Diodes", ComponentLink1Description=DataSheet, ComponentLink1URL=https://assets.nexperia.com/documents/data-sheet/PMEG3050EP.pdf, ComponentLink2Description=Digikey, ComponentLink2URL=https://www.digikey.com/en/products/detail/nexperia-usa-inc/PMEG3050EP-115/2228695?s=N4IgTCBcDaIIwHYwILQFYDMiVhQOQBEQBdAXyA, ComponentLink3Description=Mouser, ComponentLink3URL=https://eu.mouser.com/ProductDetail/Nexperia/PMEG3050EP115?qs=GcY6OjH1zdmnjQ%2FhUT5aOA%3D%3D, Element Configuration=5460ElementConfiguration, Forward Current=5A, Height=1.1mm, Lead Free=5697LeadFree, Manufacturer Part Number=PMEG3050EP,115, Max Reverse Voltage (DC)=30V, Mounting Technology=8Mount, Peak Non-Repetitive Surge Current=70A, Pins=2NUMBER, Pricing 1="1=0.61, 10=0.412, 100=0.2806, 500=0.22056, 1000=0.20071 (USD)", Pricing 2="1=0.59, 10=0.412, 50=0.412, 100=0.281, 1000=0.201, 10000=0.153 (USD)", Radiation Hardening=5898YesNo, Reach SVHC Compliant=4186SVHC, Reverse Voltage=30V, RoHS=Yes, RoHS Compliant=Yes, Stock 2=34299, Supplier 1=Digikey, Supplier 2=Mouser, Supplier Part Number 2=771-PMEG3050EP115
J1 J3 J4 J8: library part "HDR/Conn 2 Pos 5mm TH TB_282836-2", "Connector, Terminal Block; Wire Receptacle; 2 Pos.; 16-30 AWG; 0.197 in. CL; Sid", Color=Green, Current=13.5A, Flammability Rating="UL94 V-0", Manufacturer="TE Connectivity", Max Operating Temperature=105°C, Max Supply Voltage (AC)=300V, Min Operating Temperature=-40°C, Package Quantity=300, Supplier Part Number 1=A98076-ND, Voltage Rating (DC)=250V, Approvals=UL, Category="Terminal Blocks", Closed End="No (Without)", ComponentLink1Description=DataSheet, ComponentLink1URL=https://www.te.com/commerce/DocumentDelivery/DDEController?Action=srchrtrv&DocNm=1308389_EUROSTYLE_TERMINAL_BLOCKS&DocType=CS&DocLang=English, ComponentLink2Description=Digikey, ComponentLink2URL=https://www.digikey.com/en/products/detail/te-connectivity-amp-connectors/282836-2/1826939?s=N4IgTCBcDaIIIE4AcAGA7ANgLQDkAiIAugL5A, ComponentLink3Description=Mouser, ComponentLink3URL=https://eu.mouser.com/ProductDetail/TE-Connectivity/282836-2?qs=A%252Bip%252BNCYi6Ohx9vaQ1l4dg%3D%3D, Connector System=5937ConnectorSystem, Connector Type=Receptacle, Contact Material=Brass, Contact Plating=Tin, Current Rating=13.5A, Depth=8.2mm, ELV=Compliant, Housing Color=Green, Housing Material=Polyamide, Interlock="Yes (With)", Lead Free="Lead Free", Length=10.6mm, Manufacturer Part Number=282836-2, Max Current Rating=13.5A, Max Voltage Rating (AC)=300V, Mounting Technology="Through Hole", Number of Circuits=2, Number of Contacts=2, Number of Levels=1, Number of Poles=2, Number of Positions=2, Number of Positions Per Level=2, Number of Rows=1, Operating Supply Voltage=300V, Orientation=Straight, Packaging=Tray, Pitch=5mm, Plating=Brass, Pricing 1="1=0.69, 10=0.548, 25=0.4668, 50=0.4434, 100=0.4115, 300=0.39413, 600=0.38072, 1200=0.35753, 5100=0.30574 (USD)", Pricing 2="1=0.57, 10=0.437, 50=0.437, 100=0.359, 1000=0.34, 10000=0.303 (USD)", Radiation Hardening=No, Reach SVHC Compliant=Unknown, RoHS=Yes, RoHS Compliant=Yes, Screw Flange="No (Without)", Screwless Terminal Block="No (Without)", Series=Buchanan, Side Stackable="Yes (With)", Stock 1=32521, Stock 2=17355, Supplier 1=Digikey, Supplier 2=Mouser, Supplier Part Number 2=571-2828362, Tail Length=3.5mm, Termination=Solder, Thread Size=M3, Voltage=300V, Voltage Rating=300V, Width=10mm, Wire Gauge (Max)=30AWG, Wire Gauge (Min)=30AWG, Wire/Cable Gauge=30AWG
J2 J5A J5B J6A J6B: library part "HDR/Conn 2 POS 2.5mm TH Male_B2B-XH-A", "Board Connector, 2 Contact(s), 1 Row(s), Male, Straight, Solder Terminal,", Manufacturer=JST, Supplier Part Number 1=455-B2B-XH-A-ND, Category="FFC / FPC", ComponentLink1Description=DataSheet, ComponentLink1URL=https://www.jst-mfg.com/product/pdf/eng/eXH.pdf, ComponentLink2Description=Digikey, ComponentLink2URL=https://www.digikey.com/en/products/detail/jst-sales-america-inc/B2B-XH-A/1651045, Manufacturer Part Number=B2B-XH-A, Pricing 1="1=0.15, 10=0.122, 100=0.0898, 500=0.07432, 1000=0.06502, 5000=0.05573, 10000=0.05419 (USD)", RoHS=Yes, Stock 1=1122126, Supplier 1=Digi-Key
L1: library part "Ind 10uH 9A SMD_125CDMCCDS-100MC", "Ind Chip Power Metal Compound 10uH 20% 2-Pin SMD T/R", Case/Package=Nonstandard, DC Resistance (DCR)=22mR, Manufacturer=Sumida, Max Operating Temperature=125°C, Min Operating Temperature=-55°C, Saturation Current=14A, Supplier Part Number 1=308-2561-1-ND, Test Frequency=100kHz, Tolerance=20%, Category="Fixed Inductors", ComponentLink1Description=DataSheet, ComponentLink1URL=https://products.sumida.com/products/pdf/125CDMCCDS%20(en).pdf, ComponentLink2Description=Digikey, ComponentLink2URL=https://www.digikey.com/en/products/detail/sumida-america-inc/125CDMCCDS-100MC/9490412?s=N4IgTCBcDaIMwAYAcBaMBWAbARhbgcgCIgC6AvkA, ComponentLink3Description=Mouser, ComponentLink3URL=https://eu.mouser.com/ProductDetail/Sumida/125CDMCCDS-100MC?qs=%252BEew9%252B0nqrBnTd0Yj4LJzA%3D%3D, Core Material=Metal, Manufacturer Part Number=125CDMCCDS-100MC, Mounting Technology="Surface Mount", Packaging="Cut Tape", Pricing 1="1=1.52, 10=1.289, 25=1.1884, 50=1.062, 100=0.8849, 250=0.85964 (USD)", Pricing 2="1=1.52, 10=1.07, 50=1.07, 100=0.885, 1000=0.645, 10000=0.645 (USD)", RoHS=Yes, RoHS Compliant=Yes, Series=125CDMCC/DS, Shielding=Shielded, Stock 1=68, Stock 2=570, Supplier 1=Digikey, Supplier 2=Mouser, Supplier Part Number 2=851-125CDMCCDS100MC
L2: library part "Ind 33uH 3A SMD_B82477G4333M000", "Inductor Power Shielded Wirewound 33uH 20% 100KHz Ferrite 3A 53mOhm DCR Automotive Blister", Manufacturer="TDK EPCOS", Supplier Part Number 1=495-4408-1-ND, Category="Fixed Inductors", ComponentLink1Description=DataSheet, ComponentLink1URL=https://www.tdk-electronics.tdk.com/inf/30/db/ind_2008/b82477g4.pdf, ComponentLink2Description=Digikey, ComponentLink2URL=https://www.digikey.com/en/products/detail/epcos-tdk-electronics/B82477G4333M000/2651640?s=N4IgTCBcDaICwE4CsBaOcAMAOFBGFAcgCIgC6AvkA, ComponentLink3Description=Mouser, ComponentLink3URL=https://eu.mouser.com/ProductDetail/EPCOS-TDK/B82477G4333M?qs=%2FkiEPUfD%2FqndE5CDVseAgw%3D%3D, Manufacturer Part Number=B82477G4333M000, Pricing 1="1=1.26, 10=0.982, 25=0.8884, 50=0.823, 100=0.7624 (USD)", Pricing 2="1=1.32, 10=0.956, 50=0.956, 100=0.653, 1000=0.576, 10000=0.507 (USD)", RoHS=Yes, Stock 1=1511, Stock 2=2432, Supplier 1=Digikey, Supplier 2=Mouser, Supplier Part Number 2=871-B82477G4333M
MH1 MH2 MH3 MH4: library part "Mounting Hole M3 D3.5mm"
Q4 Q5: library part "Trans N-Channel 30V 12A PowerPak 1212-8_SIS412DN-T1-GE3", "SiS412DN Series N-Channel 30 V 24 mOhms SMT Power Mosfet - PowerPAK-1212-8", Manufacturer="Vishay Siliconix", Supplier Part Number 1=SIS412DN-T1-GE3CT-ND, Category=MOSFETs, ComponentLink1Description=DataSheet, ComponentLink1URL=https://www.vishay.com/docs/69006/sis412dn_new.pdf, ComponentLink2Description=Digikey, ComponentLink2URL=https://www.digikey.com/en/products/detail/vishay-siliconix/SIS412DN-T1-GE3/2441823?s=N4IgTCBcDaIMoEk4BYCMYAiA5AtAFVRwHEBRAZgGE8csMQBdAXyA, ComponentLink3Description=Mouser, ComponentLink3URL=https://eu.mouser.com/ProductDetail/Vishay-Semiconductors/SIS412DN-T1-GE3?qs=cPOO8qjhL6NqDrBget0Fyg%3D%3D, Manufacturer Part Number=SIS412DN-T1-GE3, Pricing 1="1=0.73, 10=0.491, 100=0.3361, 500=0.26568, 1000=0.24245 (USD)", Pricing 2="1=0.64, 10=0.459, 50=0.459, 100=0.332, 1000=0.239, 10000=0.215 (USD)", RoHS=Yes, Stock 1=40457, Stock 2=21775, Supplier 1=Digikey, Supplier 2=Mouser, Supplier Part Number 2=781-SIS412DN-T1-GE3
R1: library part "Res 510kΩ 0603(1608) 1% 0.1W_RMCF0603FT510K", "Res Thick Film 0603 510kΩ 1% 1/10W ±100ppm/°C Molded SMD SMD Paper T/R", Case Code (Imperial)=0603, Case Code (Metric)=1608, Manufacturer="Stackpole Electronics", Max Operating Temperature=155°C, Max Power Dissipation=100mW, Min Operating Temperature=-55°C, Package Quantity=5000, Supplier Part Number=RMCF0603FT510KCT-ND, Temperature Coefficient=100ppm/°C, Tolerance=1%, Voltage Rating=75V, Case/Package=0603, Category="Chip SMD Resistors", ComponentLink1Description=DataSheet, ComponentLink1URL=https://www.seielect.com/catalog/sei-rmcf_rmcp.pdf, ComponentLink2Description=Digikey, ComponentLink2URL=https://www.digikey.com/en/products/detail/stackpole-electronics-inc/RMCF0603FT510K/1760917, ComponentLink3Description=Mouser, ComponentLink3URL=https://eu.mouser.com/ProductDetail/SEI-Stackpole/RMCF0603FT510K?qs=IPgv5n7u5QbYeemNzzOorg%3D%3D, Contact Plating=Tin,Matte, Features="Automotive AEC-Q200", Height=0.022inch, Lead Free=5697LeadFree, Length=0.061inch, Manufacturer Part Number=RMCF0603FT510K, Mounting Technology="Surface Mount", Number of Terminations=2, Packaging="Tape and Reel", Pricing="1=0.1, 10=0.015, 50=0.0092, 100=0.0075, 500=0.0049, 1000=0.00415 (USD)", Radiation Hardening=No, RoHS=Yes, RoHS Compliant=Yes, Series=RMCF, Stock=158871, Supplier=Digikey, Width=0.031inch
R2: library part "Res POT 1MΩ 10% 0.5W_3361P-1-105GLF", "Resistor Trimmer, Cermet, 1MΩ, ± 10%, 500 mW, 1 Turn, Single Turn, Surface Mount", Manufacturer=Bourns, Supplier Part Number=3361P-1-105GLFCT-ND, Category="Variable Resistors and Potentiometers", ComponentLink1Description=DataSheet, ComponentLink1URL=https://www.bourns.com/docs/Product-Datasheets/3361.pdf, ComponentLink2Description=Digikey, ComponentLink2URL=https://www.digikey.com/en/products/detail/bourns-inc/3361P-1-105GLF/1817612, ComponentLink3Description=Mouser, ComponentLink3URL=https://eu.mouser.com/ProductDetail/Bourns/3361P-1-105GLF?qs=fHAReS3gvjLSMYSnFcSX8Q%3D%3D, Manufacturer Part Number=3361P-1-105GLF, Pricing="1=1.37, 10=1.1, 25=1.008, 50=0.9434, 100=0.8826, 250=0.80784 (USD)", RoHS=Yes, Stock=1435, Supplier=Digikey
R3: library part "Res POT 500kΩ 10% 0.5W_3361P-1-504GLF", "SMD Single-Turn Trimmer Potentiometers 1/4 SQ 500KOHMS 10% 0.5WATTS", Manufacturer=Bourns, Supplier Part Number=3361P-1-504GLFCT-ND, Category="Variable Resistors and Potentiometers", ComponentLink1Description=DataSheet, ComponentLink1URL=https://www.bourns.com/docs/Product-Datasheets/3361.pdf, ComponentLink2Description=Digikey, ComponentLink2URL=https://www.digikey.com/en/products/detail/bourns-inc/3361P-1-504GLF/1817611, ComponentLink3Description=Mouser, ComponentLink3URL=https://eu.mouser.com/ProductDetail/Bourns/3361P-1-504GLF?qs=fqIB%2FsSTfTaKxcvNNIdl2Q%3D%3D, Manufacturer Part Number=3361P-1-504GLF, Pricing="1=1.37, 10=1.1, 25=1.008, 50=0.9434, 100=0.8826, 250=0.80784 (USD)", RoHS=Yes, Stock=1099, Supplier=Digikey
R4: library part "Res 36kΩ 0603(1608) 1% 0.1W_RK73H1JTTD3602F", "Res Thick Film 0603 36kΩ 1% 0.1W(1/10W) ±100ppm/C Pad SMD Automotive T/R", Case Code (Imperial)=0603, Case Code (Metric)=1608, Manufacturer="KOA Speer", Max Operating Temperature=155°C, Min Operating Temperature=-55°C, Package Quantity=5000, Power Rating=100mW, Resistance Tolerance=1%, Resistor Type="Thick Film", Supplier Part Number 1=2019-RK73H1JTTD3602FCT-ND, Temperature Coefficient=100ppm/°C, Voltage Rating=50V, Case/Package=0603, Category="Chip SMD Resistors", ComponentLink1Description=DataSheet, ComponentLink1URL=https://www.koaspeer.com/pdfs/RK73H.pdf, ComponentLink2Description=Digikey, ComponentLink2URL=https://www.digikey.com/en/products/detail/koa-speer-electronics-inc/RK73H1JTTD3602F/9845186, ComponentLink3Description=Mouser, ComponentLink3URL=https://eu.mouser.com/ProductDetail/KOA-Speer/RK73H1JTTD3602F?qs=SsozRxUJO6Tb%252B7Xx8%2F1zLA%3D%3D, Construction=Rectangular, Depth=0.8mm, Height=0.45mm, Lead Free="Lead Free", Length=1.6mm, Manufacturer Part Number=RK73H1JTTD3602F, Military Standard=Not, Packaging="Tape and Reel", Pins=2, Pricing 1="1=0.1, 10=0.021, 50=0.013, 100=0.0108, 500=0.00734, 1000=0.00631 (USD)", Pricing 2="1=0.1, 10=0.014, 50=0.014, 100=0.007, 1000=0.005, 10000=0.003 (USD)", Reach SVHC Compliant=Unknown, RoHS=Yes, RoHS Compliant=Yes, Series=RK73H, Stock 1=196036, Stock 2=199931, Supplier 1=Digi-Key, Supplier 2=Mouser, Supplier Part Number 2=660-RK73H1JTTD3602F, Termination=SMD/SMT, Tolerance=1%, Width=0.8mm
R5: library part "Res 2Ω 2512(6432) 5% 1W_RMCF2512JT2R00", "Res Thick Film 2512 2Ω 5% 1W ±400ppm/°C Molded SMD SMD Plastic T/R", Manufacturer="Stackpole Electronics", Supplier Part Number 1=RMCF2512JT2R00CT-ND, Category="Chip SMD Resistors", ComponentLink1Description=DataSheet, ComponentLink1URL=https://www.seielect.com/catalog/sei-rmcf_rmcp.pdf, ComponentLink2Description=Digikey, ComponentLink2URL=https://www.digikey.com/en/products/detail/stackpole-electronics-inc/RMCF2512JT2R00/1757010?s=N4IgTCBcDaIEoFkDCAxMBWAjGAUgFTDgAYik8BaAOQBEQBdAXyA, ComponentLink3Description=Mouser, ComponentLink3URL=https://eu.mouser.com/ProductDetail/SEI-Stackpole/RMCF2512JT2R00?qs=FESYatJ8odIHoxqdUGtqxw%3D%3D, Manufacturer Part Number=RMCF2512JT2R00, Pricing 1="1=0.16, 10=0.083, 50=0.057, 100=0.0491, 500=0.03606, 1000=0.03195 (USD)", Pricing 2="1=0.16, 10=0.057, 50=0.057, 100=0.036, 1000=0.032, 10000=0.025 (USD)", RoHS=Yes, Stock 1=306573, Stock 2=126711, Supplier 1=Digikey, Supplier 2=Mouser, Supplier Part Number 2=708-RMCF2512JT2R00, Vaue=2Ω
R6: library part "Res 10Ω 1206(3216) 1% 1W_CSRT1206FT10R0", "10Ω ±1% 1W Chip Resistor 1206 (3216 Metric) Automotive AEC-Q200, Current Sense Thin Film", Manufacturer="Stackpole Electronics", Supplier Part Number=738-CSRT1206FT10R0CT-ND, Category="Chip SMD Resistors", ComponentLink1Description=DataSheet, ComponentLink1URL=https://www.seielect.com/catalog/sei-csrt.pdf, ComponentLink2Description=Digikey, ComponentLink2URL=https://www.digikey.com/en/products/detail/stackpole-electronics-inc/CSRT1206FT10R0/16206710, ComponentLink3Description=Mouser, ComponentLink3URL=CSRT1206FT10R0, Manufacturer Part Number=CSRT1206FT10R0, Pricing="1=0.3, 10=0.168, 25=0.1348, 50=0.1146, 100=0.098, 250=0.08028, 500=0.06944, 1000=0.0604 (USD)", RoHS=Yes, Stock=4729, Supplier=Digikey
R7 R8 R13: library part "Res 560Ω 0603(1608) 1% 1/8W_RK73H1JTTD5600F", "Res Thick Film 0603 560Ω 1% 0.125W(1/8W) ±100ppm/C Pad SMD Automotive T/R", Case Code (Imperial)=0603, Case Code (Metric)=1608, Manufacturer="KOA Speer", Max Operating Temperature=155°C, Max Power Dissipation=125mW, Min Operating Temperature=-55°C, Package Quantity=5000, Power Rating=100mW, Ratings=AEC-Q200, Resistance Tolerance=1%, Resistor Type="Thick Film", Supplier Part Number 1=2019-RK73H1JTTD5600FCT-ND, Temperature Coefficient=100ppm/°C, Voltage Rating=50V, Case/Package=0603, Category="Chip SMD Resistors", ComponentLink1Description=DataSheet, ComponentLink1URL=https://www.koaspeer.com/pdfs/RK73H.pdf, ComponentLink2Description=Digikey, ComponentLink2URL=https://www.digikey.com/en/products/detail/koa-speer-electronics-inc/RK73H1JTTD5600F/9845004, ComponentLink3Description=Mouser, ComponentLink3URL=https://eu.mouser.com/ProductDetail/KOA-Speer/RK73H1JTTD5600F?qs=xvPx1Sss7ZGkGQIBdLACSQ%3D%3D, Construction=Rectangular, Depth=0.8mm, Features="Moisture Resistant,Automotive AEC-Q200", Height=0.45mm, Lead Free="Lead Free", Length=1.6mm, Manufacturer Part Number=RK73H1JTTD5600F, Military Standard=Not, Number of Terminations=2, Packaging="Tape and Reel", Pricing 1="1=0.1, 10=0.021, 50=0.013, 100=0.0108, 500=0.00734, 1000=0.00631 (USD)", Pricing 2="1=0.1, 10=0.014, 50=0.014, 100=0.007, 1000=0.005, 10000=0.003 (USD)", Reach SVHC Compliant=Unknown, RoHS=Yes, RoHS Compliant=Yes, Series=RK73H, Stock 1=102901, Stock 2=113408, Supplier 1=Digikey, Supplier 2=Mouser, Supplier Part Number 2=660-RK73H1JTTD5600F, Termination=SMD/SMT, Tolerance=1%, Voltage Rating (DC)=50V, Width=0.8mm
R9: library part "Res 9.31kΩ 0603(1608) 1% 0.1W_RMCF0603FT9K31", "Res Thick Film 0603 9.31kΩ 1% 0.1W ±100ppm/°C Molded SMD Paper T/R", Manufacturer="Stackpole Electronics", Supplier Part Number=RMCF0603FT9K31CT-ND, Voltage Rating=75V, Category="Chip SMD Resistors", ComponentLink1Description=DataSheet, ComponentLink1URL=https://www.seielect.com/catalog/sei-rmcf_rmcp.pdf, ComponentLink2Description=Digikey, ComponentLink2URL=https://www.digikey.com/en/products/detail/stackpole-electronics-inc/RMCF0603FT9K31/1760972, ComponentLink3Description=Mouser, ComponentLink3URL=https://eu.mouser.com/ProductDetail/SEI-Stackpole/RMCF0603FT9K31?qs=FESYatJ8odJF%2F6oKMkuOfw%3D%3D, Lead Free=5697LeadFree, Manufacturer Part Number=RMCF0603FT9K31, Pricing="1=0.1, 10=0.015, 50=0.0092, 100=0.0075, 500=0.0049, 1000=0.00415 (USD)", RoHS=Yes, Stock=28454, Supplier=Digikey
R10: library part "Res 49.9kΩ 0603(1608) 1% 0.1W_RMCF0603FT49K9", "Res Thick Film 0603 49.9kΩ 1% 0.1W ±100ppm/°C Molded SMD Paper T/R", Manufacturer="Stackpole Electronics", Supplier Part Number=RMCF0603FT49K9CT-ND, Voltage Rating=75V, Category="Chip SMD Resistors", ComponentLink1Description=DataSheet, ComponentLink1URL=https://www.seielect.com/catalog/sei-rmcf_rmcp.pdf, ComponentLink2Description=Digikey, ComponentLink2URL=https://www.digikey.com/en/products/detail/stackpole-electronics-inc/RMCF0603FT49K9/1760907, ComponentLink3Description=Mouser, ComponentLink3URL=https://eu.mouser.com/ProductDetail/SEI-Stackpole/RMCF0603FT49K9?qs=FESYatJ8odKHqtEvmpwEUg%3D%3D, Lead Free=5697LeadFree, Manufacturer Part Number=RMCF0603FT49K9, Pricing="1=0.1, 10=0.015, 50=0.0092, 100=0.0075, 500=0.0049, 1000=0.00415 (USD)", RoHS=Yes, Stock=463064, Supplier=Digikey